# Altium PCB VEND2.PcbDoc
Units mm, origin at the board's own origin, x right, y up, seen from the top; angles counter-clockwise.
Board outline 149.99 x 100.08 mm, 2 copper layers (Top Layer, Bottom Layer); 131 components, 110 nets, 499 pads, 0 vias.
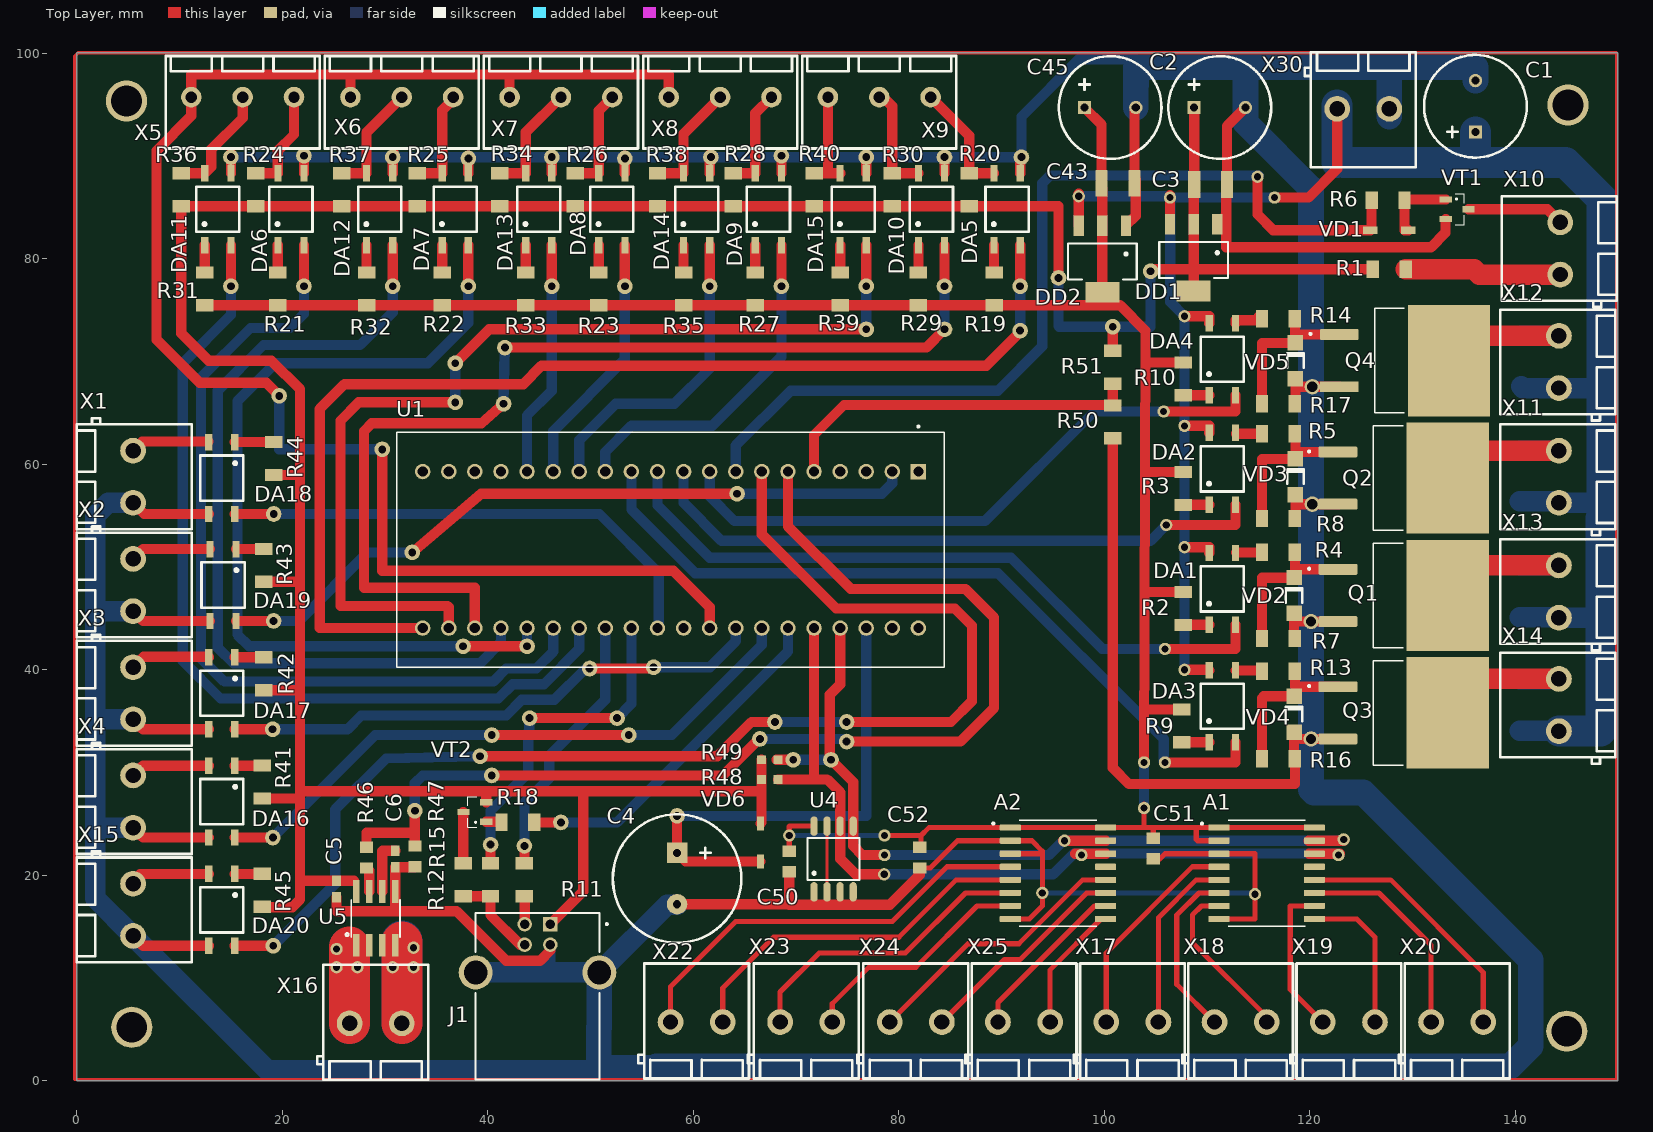
[diagram p0: Top Layer view]
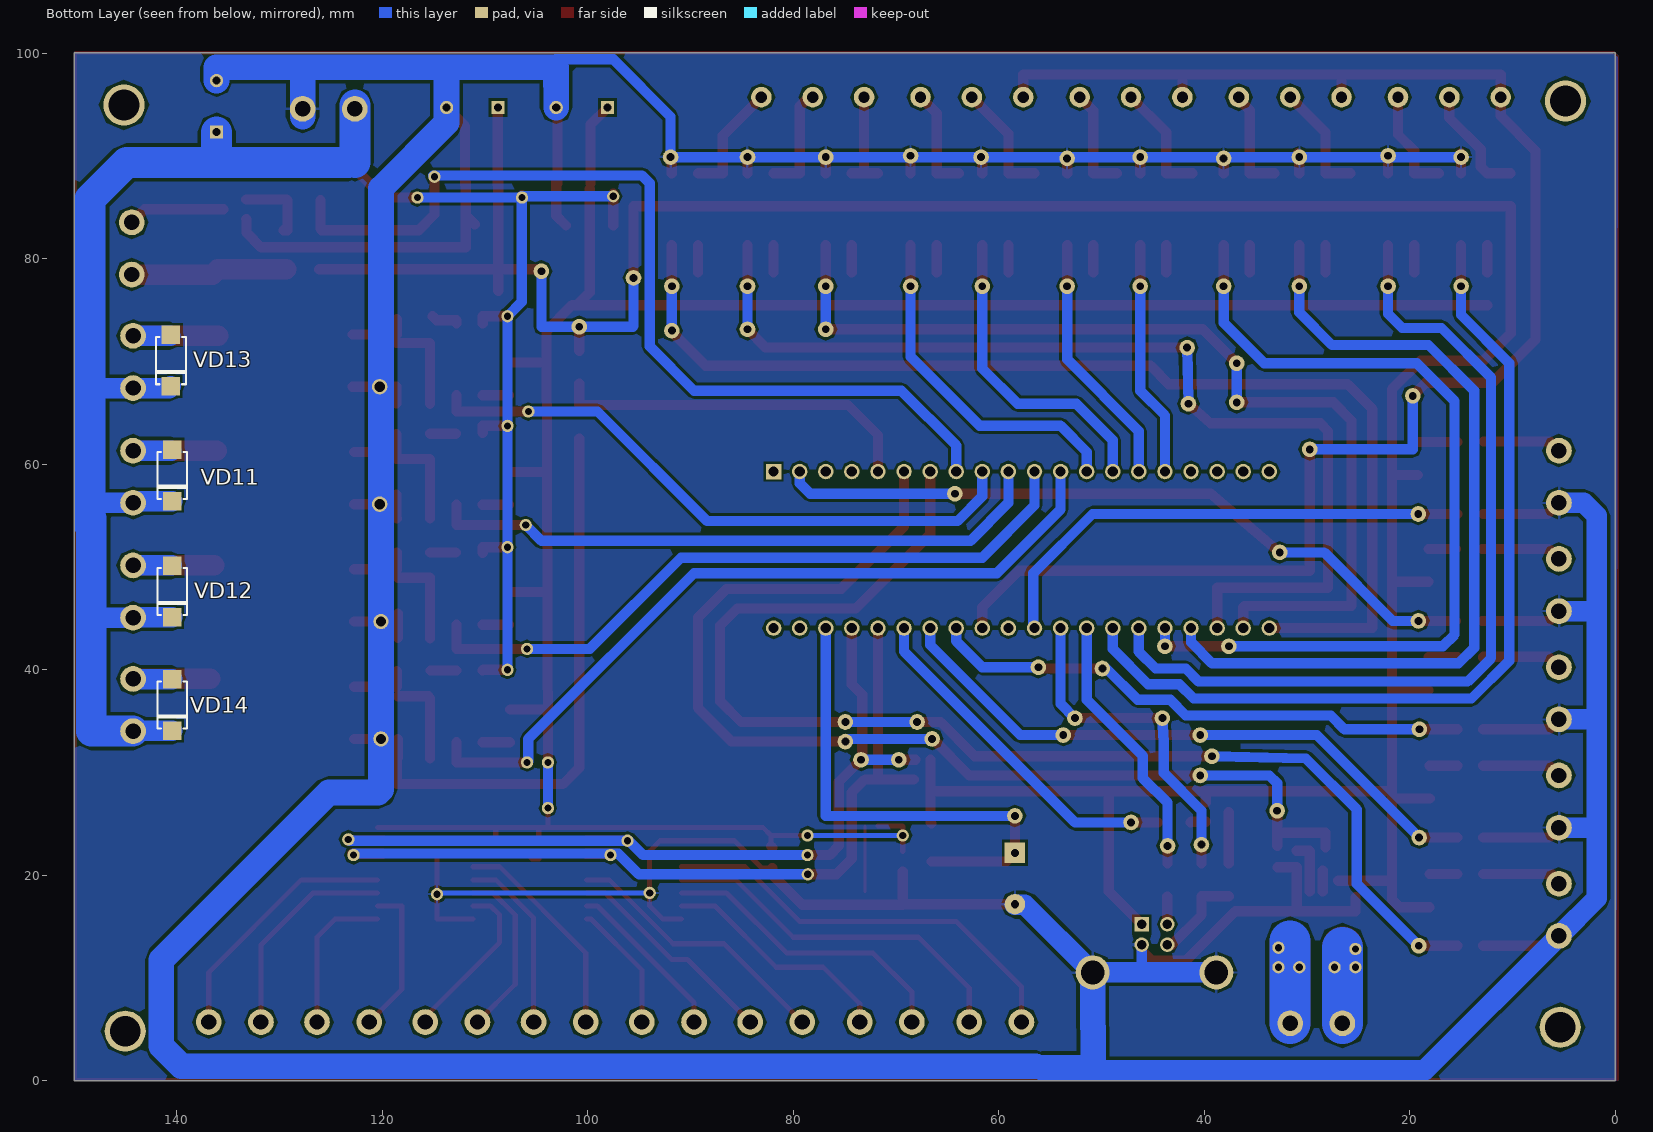
[diagram p1: Bottom Layer view, seen from below]
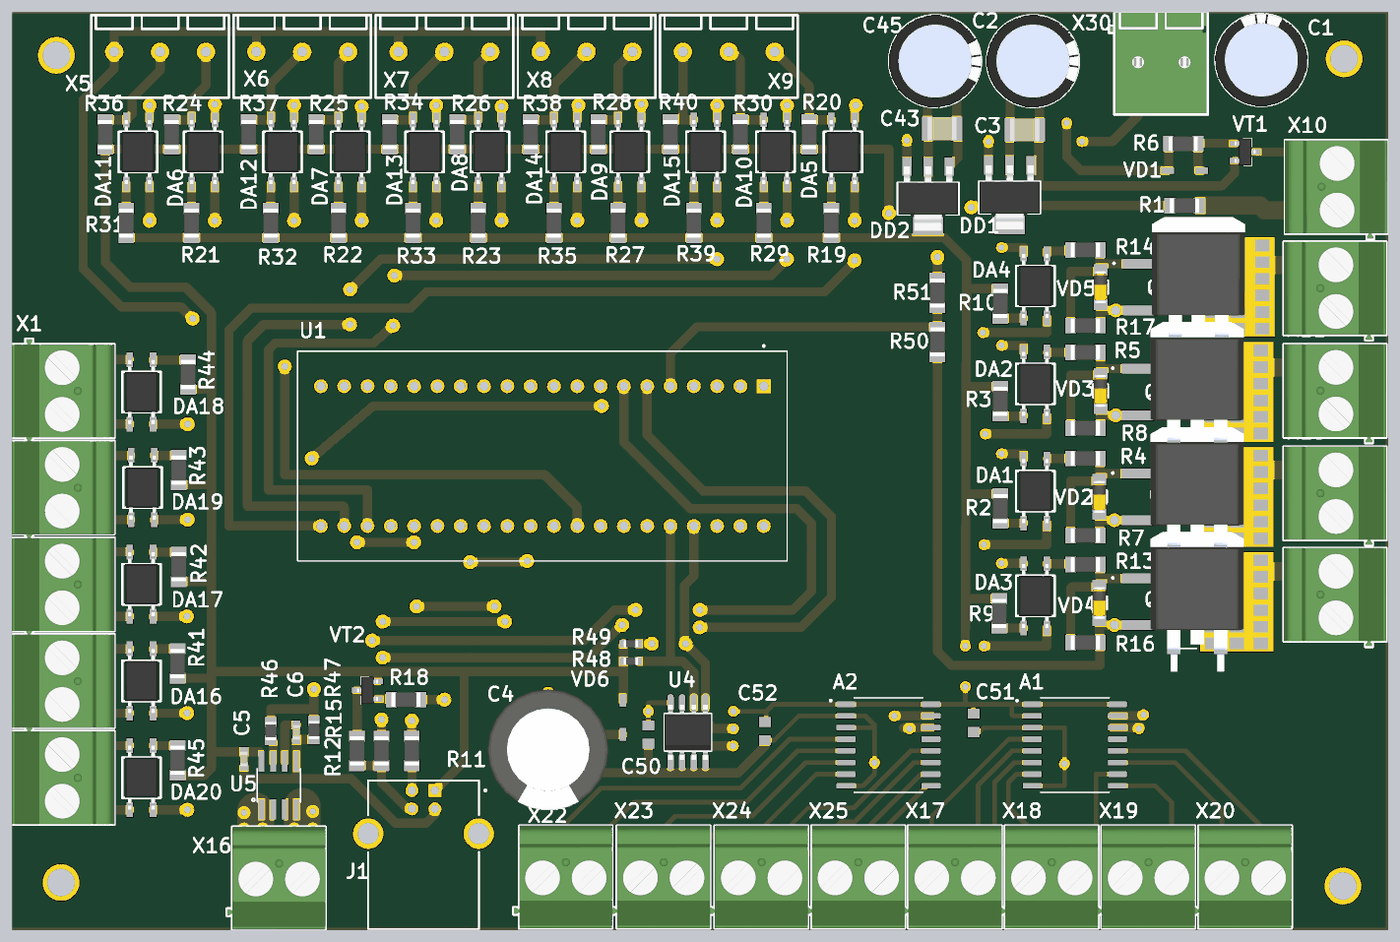
[diagram p2: 3D render of the assembled board from above, using the file's embedded part models]
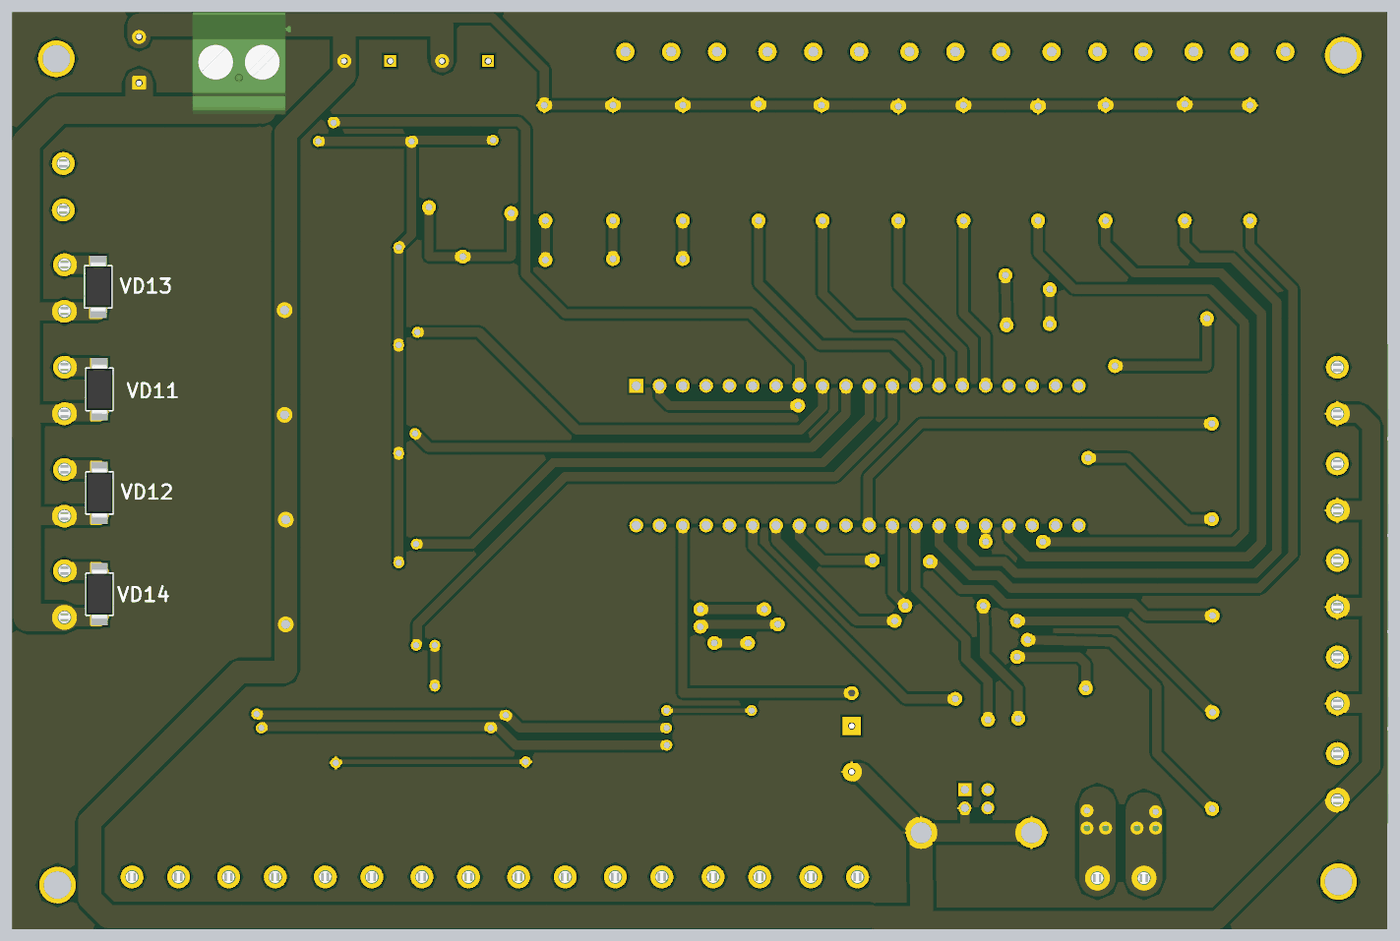
[diagram p3: 3D render of the assembled board from below, using the file's embedded part models]

## Layer stack, top to bottom
Top Solder: solder mask 0.0102, Solder Resist, Dk 3.5
Top Layer: signal copper 0.0356
Dielectric 1: dielectric 0.32, FR-4, Dk 4.8
Bottom Layer: signal copper 0.0356
Bottom Solder: solder mask 0.0102, Solder Resist, Dk 3.5

## Board outline
0,0 149.987,0 149.987,100.076 0,100.076

## Design rules (kind name [scope] priority, off if disabled: settings)
Clearance [All] p1: gap=0.254
PolygonConnect [All] p1: connectstyle=Relief reliefconductorwidth=0.254 reliefentries=4 polygonreliefangle="90 Angle" airgapwidth=0.254
RoomDefinition OUT [InComponentClass('OUT')] p1: confinementstyle=ConfineIn formatcopy=TRUE lockcomponents=FALSE outline 272.796,1.524 546.735,1.524 546.735,34.544 272.796,34.544
RoomDefinition PWR [InComponentClass('PWR')] p2: confinementstyle=ConfineIn formatcopy=TRUE lockcomponents=FALSE outline 179.07,167.513 429.387,167.513 429.387,185.801 179.07,185.801
RoomDefinition STM [InComponentClass('STM')] p3: confinementstyle=ConfineIn formatcopy=TRUE lockcomponents=FALSE outline 302.133,58.928 661.035,58.928 661.035,117.983 302.133,117.983
RoutingVias [All] p1: holewidth=0.711 width=1.27 viastyle="Through Hole" minholewidth=0.711 minwidth=1.27 maxholewidth=0.711 maxwidth=1.27
SolderMaskExpansion [All] p1: expansion=0.102
Width [All] p1: maxlimit=4 minlimit=0.3 preferedwidth=2.5
30 further rules are at their usual default settings.

## Classes and differential pairs
component class OUT: Q1 Q2 Q3 Q4 R7 R8 R9 R10 R11 R12 R13 R14 R15 R16 R17 R18 VD1 VD2 VD3 VD4 VD5 VD11 VD12 VD13 VT2 X11 X12 X13 X14
component class PWR: DA6 DA7 DA8 DA9 DA10
component class STM: C4 DA20 DD1 R41 R42 R43 R44 R49 R50 U1 VD6 X1 X2 X3 X4 X15

## Components (designator, comment, footprint, x,y, rotation, side; value= is the part's Value field where it differs from the comment)
A1 "PCF8574DW" SOIC127P1030X265-16N 115.824,20.193 r0 top
A2 "PCF8574DW" SOIC127P1030X265-16N 95.504,20.193 r0 top
C1 "1000 мкФ" C_10x5 136.144,94.869 r90 top
C2 "1000 мкФ" C_10x5 111.252,94.742 r0 top
C3 "0.1мкФ" C_1210 110.363,87.249 r0 top
C4 "1000 мкФ" C_12.5x5 58.42,19.685 r270 top
C5 "? мкФ" C_0603 25.273,18.669 r270 top
C6 "? мкФ" C_0603 30.988,21.59 r270 top
C43 "0.1мкФ" C_1210 101.346,87.376 r0 top
C45 "1000 мкФ" C_10x5 100.584,94.742 r0 top
C50 "0.1 мкФ" C_0805 69.342,21.336 r270 top
C51 "0.1 мкФ" C_0805 104.775,22.606 r270 top
C52 "0.1 мкФ" C_0805 82.042,21.717 r270 top
DA1 "KPC357NT" Mini-flat-4 111.506,47.879 r90 top
DA2 "KPC357NT" Mini-flat-4 111.506,59.563 r90 top
DA3 "KPC357NT" Mini-flat-4 111.506,36.449 r90 top
DA4 "KPC357NT" Mini-flat-4 111.506,70.231 r90 top
DA5 "KPC357NT" Mini-flat-4 90.551,84.836 r90 top
DA6 "KPC357NT" Mini-flat-4 20.828,84.836 r90 top
DA7 "KPC357NT" Mini-flat-4 36.83,84.836 r90 top
DA8 "KPC357NT" Mini-flat-4 52.07,84.836 r90 top
DA9 "KPC357NT" Mini-flat-4 67.31,84.836 r90 top
DA10 "KPC357NT" Mini-flat-4 83.185,84.841 r90 top
DA11 "KPC357NT" Mini-flat-4 13.716,84.836 r90 top
DA12 "KPC357NT" Mini-flat-4 29.464,84.836 r90 top
DA13 "KPC357NT" Mini-flat-4 44.958,84.836 r90 top
DA14 "KPC357NT" Mini-flat-4 60.325,84.836 r90 top
DA15 "KPC357NT" Mini-flat-4 75.565,84.841 r90 top
DA16 "KPC357NT" Mini-flat-4 14.097,27.178 r270 top
DA17 "KPC357NT" Mini-flat-4 14.097,37.719 r270 top
DA18 "KPC357NT" Mini-flat-4 14.097,58.674 r270 top
DA19 "KPC357NT" Mini-flat-4 14.224,48.26 r270 top
DA20 "KPC357NT" Mini-flat-4 14.097,16.637 r270 top
DD1 "LD1117S" SOT223 108.712,79.883 r270 top
DD2 "LD1117S" SOT223 99.822,79.756 r270 top
J1 "USB-B-S-X-X-TH" SAMTEC_USB-B-S-X-X-TH 44.831,10.541 r0 top
Q1 "IRFZ44N" DPAK254P1524X483-3N 129.159,47.244 r0 top
Q2 "IRFZ44N" DPAK254P1524X483-3N 129.159,58.674 r0 top
Q3 "IRFZ44N" DPAK254P1524X483-3N 129.159,35.814 r0 top
Q4 "IRFZ44N" DPAK254P1524X483-3N 129.286,70.104 r0 top
R1 "?K" R_1206 127.762,78.994 r180 top
R2 "?K" R_1206 107.696,45.974 r270 top
R3 "?K" R_1206 107.696,57.658 r270 top
R4 "?K" R_1206 116.967,51.435 r180 top
R5 "?K" R_1206 116.967,62.992 r180 top
R6 "100" R_1206 127.635,85.725 r0 top
R7 "?K" R_1206 116.967,43.053 r180 top
R8 "?K" R_1206 116.967,54.737 r180 top
R9 "?K" R_1206 107.569,34.544 r270 top
R10 "?K" R_1206 107.696,68.326 r270 top
R11 "100" R_1206 43.561,19.558 r270 top
R12 "100" R_1206 40.259,19.558 r270 top
R13 "?K" R_1206 116.967,39.878 r180 top
R14 "?K" R_1206 116.967,74.168 r180 top
R15 "1.5K" R_1206 37.592,19.558 r90 top
R16 "?K" R_1206 116.967,31.369 r180 top
R17 "?K" R_1206 116.967,65.913 r180 top
R18 "1K" R_1206 42.926,25.146 r180 top
R19 "?K" R_1206 89.281,77.089 r90 top
R20 "?K" R_1206 86.868,86.741 r90 top
R21 "?K" R_1206 19.558,77.089 r90 top
R22 "?K" R_1206 35.56,77.089 r90 top
R23 "?K" R_1206 50.8,77.089 r90 top
R24 "?K" R_1206 17.399,86.741 r90 top
R25 "?K" R_1206 33.147,86.741 r90 top
R26 "?K" R_1206 48.514,86.741 r90 top
R27 "?K" R_1206 66.04,77.089 r90 top
R28 "?K" R_1206 63.881,86.741 r90 top
R29 "?K" R_1206 81.915,77.089 r90 top
R30 "?K" R_1206 79.375,86.741 r90 top
R31 "?K" R_1206 12.446,77.089 r90 top
R32 "?K" R_1206 28.194,77.089 r90 top
R33 "?K" R_1206 43.688,77.089 r90 top
R34 "?K" R_1206 41.148,86.741 r90 top
R35 "?K" R_1206 59.055,77.089 r90 top
R36 "?K" R_1206 10.16,86.741 r90 top
R37 "?K" R_1206 25.781,86.741 r90 top
R38 "?K" R_1206 56.515,86.741 r90 top
R39 "?K" R_1206 74.295,77.089 r90 top
R40 "?K" R_1206 71.755,86.741 r90 top
R41 "?K" R_1206 18.034,29.083 r90 top
R42 "?K" R_1206 18.161,39.624 r90 top
R43 "?K" R_1206 18.161,50.165 r90 top
R44 "?K" R_1206 19.177,60.579 r90 top
R45 "?K" R_1206 18.034,18.542 r90 top
R46 "Value" R_0805 28.194,21.717 r90 top
R47 "?K" R_0805 32.893,21.844 r270 top
R48 "?K" R_0603 67.437,29.337 r0 top
R49 "?K" R_0603 67.437,31.242 r0 top
R50 "?K" R_1206 100.838,64.135 r90 top
R51 "?K" R_1206 100.838,69.469 r270 top
U1 "ZC323000" MODULE_ZC323000 57.785,51.689 r270 top
U4 "AT24C256C-SSHL-B" SOIC8 73.66,21.59 r90 top
U5 "ACS712" SO08 29.083,15.799 r0 top
VD1 "SMA400*" SOD-123 127.762,82.804 r180 top
VD2 "10В" DL-35 118.491,47.244 r90 top
VD3 "10В" DL-35 118.618,58.801 r90 top
VD4 "10В" DL-35 118.491,35.687 r90 top
VD5 "10В" DL-35 118.618,70.104 r90 top
VD6 "1N4148W" SOD-123 66.548,23.194 r270 top
VD11 "SMA400*" "SMA (DO-214AC)" 140.462,58.928 r270 bottom
VD12 "SMA400*" "SMA (DO-214AC)" 140.462,47.625 r270 bottom
VD13 "SMA400*" "SMA (DO-214AC)" 140.589,70.104 r270 bottom
VD14 "SMA400*" "SMA (DO-214AC)" 140.462,36.576 r270 bottom
VT1 "2N7002.215" SOT23 134.366,84.836 r0 top
VT2 "BC857" SOT23 38.735,26.162 r180 top
X1 "DG508V-02" DG508V-02 5.461,58.801 r270 top
X2 "DG508V-02" DG508V-02 5.461,48.26 r270 top
X3 "DG508V-02" DG508V-02 5.461,37.719 r270 top
X4 "DG508V-02" DG508V-02 5.461,27.178 r270 top
X5 "300-031-12" 300-031-12 16.129,95.758 r180 top
X6 "300-031-12" 300-031-12 31.623,95.758 r180 top
X7 "300-031-12" 300-031-12 47.117,95.758 r180 top
X8 "300-031-12" 300-031-12 62.611,95.758 r180 top
X9 "300-031-12" 300-031-12 78.105,95.758 r180 top
X10 "DG508V-02" DG508V-02 144.399,81.026 r90 top
X11 "DG508V-02" DG508V-02 144.272,58.801 r90 top
X12 "DG508V-02" DG508V-02 144.272,69.977 r90 top
X13 "DG508V-02" DG508V-02 144.272,47.625 r90 top
X14 "DG508V-02" DG508V-02 144.272,36.576 r90 top
X15 "DG508V-02" DG508V-02 5.461,16.637 r270 top
X16 "DG508V-02" DG508V-02 29.083,5.588 r0 top
X17 "DG508V-02" DG508V-02 102.743,5.715 r0 top
X18 "DG508V-02" DG508V-02 113.284,5.715 r0 top
X19 "DG508V-02" DG508V-02 123.825,5.715 r0 top
X20 "DG508V-02" DG508V-02 134.366,5.715 r0 top
X22 "DG508V-02" DG508V-02 60.325,5.715 r0 top
X23 "DG508V-02" DG508V-02 70.993,5.715 r0 top
X24 "DG508V-02" DG508V-02 81.661,5.715 r0 top
X25 "DG508V-02" DG508V-02 92.202,5.715 r0 top
X30 "DG508V-02" DG508V-02 125.222,94.615 r0 top

## Footprints (in the part's own frame and the unit in brackets; to place one, negate y for a bottom-side part, rotate by r counter-clockwise, add the part's x,y. Pads: shape width x height; smd on the part's side, far side on the other; paste and mask are expansions set on the pad)
300-031-12 [mm] "шаг 5 мм"
  round 2 hole 1.1: 1(-5,0) 2(0,0) 3(5,0)
  silkscreen extent -7.5,-4 7.5,5
C_10x5 [mm] "в отверстие"
  rect 1.3x1.3 hole 0.8: 1(-2.5,0)
  round 1.3 hole 0.8: 2(2.5,0)
  silkscreen extent -5,-5 5,5, body extent -5.04,-5.06 5.08,5.06, height 13.2
C_12.5x5 [mm] "в отверстие"
  rect 2x2 hole 0.8: 1(-2.5,0)
  round 2 hole 0.8: 2(2.5,0)
  silkscreen extent -6.25,-6.25 6.25,6.25, body extent -6.6,-6.6 6.6,6.6, height 25.4
C_0603 [mm] "SMD"
  rect 1x0.85 smd: 1(-0.8,0) 2(0.8,0)
  body extent -0.8,-0.4 0.8,0.4, height 0.79
C_0805 [mm] "SMD"
  rect 1.1x1.3 smd: 1(-1,0) 2(1,0)
  body extent -1,-0.62 1,0.63, height 0.6
C_1210 [mm] "SMD"
  rect 1.2x2.6 smd: 1(-1.6,0) 2(1.6,0)
  body extent -1.6,-1.25 1.6,1.25, height 0.77
DG508V-02 [mm] "шаг 5,08 мм"
  round 2.5 hole 1.5: 1(-2.54,0) 2(2.54,0)
  silkscreen extent -5.7,-5.5 5.1,5.7, body extent -5.63,-5.5 5.1,5.7, height 18.3
DL-35 [mm] "SMD"
  rect 1.5x1.5 smd: 1(-1.75,0) 2(1.75,0)
  silkscreen extent -0.7,-0.8 0.7,0.8, body extent -1.75,-0.75 1.75,0.75, height 1.49
DPAK254P1524X483-3N [mm]
  rrect25% 3.78x1.06 smd: 1(-6.4,2.54) 3(-6.4,-2.54)
  rect 8x10.84 smd paste-6: 2(4.29,0)
  silkscreen extent -9.3,-5.08 -0.05,5.08, body extent -5.08,-7.62 5.08,7.62, height 4.83
Mini-flat-4 [mm] "SMD"
  rect 1.6x0.7 smd: 1(-3.5,1.27) 2(-3.5,-1.27) 3(3.5,-1.27) 4(3.5,1.27)
  silkscreen extent -2.2,-2.1 2.2,2.1, body extent -3.5,-1.8 3.5,1.8, height 2
MODULE_ZC323000 [mm]
  rect 1.508x1.508 hole 1: 1(-7.62,24.13)
  round 1.508 hole 1: 2(-7.62,21.59) 3(-7.62,19.05) 4(-7.62,16.51) 5(-7.62,13.97) 6(-7.62,11.43) 7(-7.62,8.89) 8(-7.62,6.35) 9(-7.62,3.81) 10(-7.62,1.27) 11(-7.62,-1.27) 12(-7.62,-3.81) 13(-7.62,-6.35) 14(-7.62,-8.89) 15(-7.62,-11.43) 16(-7.62,-13.97) 17(-7.62,-16.51) 18(-7.62,-19.05) 19(-7.62,-21.59) 20(-7.62,-24.13) 21(7.62,-24.13) 22(7.62,-21.59) 23(7.62,-19.05) 24(7.62,-16.51) 25(7.62,-13.97) 26(7.62,-11.43) 27(7.62,-8.89) 28(7.62,-6.35) 29(7.62,-3.81) 30(7.62,-1.27) 31(7.62,1.27) 32(7.62,3.81) 33(7.62,6.35) 34(7.62,8.89) 35(7.62,11.43) 36(7.62,13.97) 37(7.62,16.51) 38(7.62,19.05) 39(7.62,21.59) 40(7.62,24.13)
  silkscreen extent -12.1,-26.67 11.43,26.67
R_0603 [mm] "SMD"
  rect 0.85x0.85 smd: 1(-0.8,0) 2(0.8,0)
  body extent -0.8,-0.4 0.8,0.4, height 0.38
R_0805 [mm] "SMD"
  rect 1.1x1.25 smd: 1(-1,0) 2(1,0)
  body extent -1,-0.6 1,0.6, height 0.5
R_1206 [mm] "SMD"
  rect 1.2x1.7 smd: 1(-1.6,0) 2(1.6,0)
  body extent -1.6,-0.8 1.6,0.8, height 0.6
SAMTEC_USB-B-S-X-X-TH [mm]
  rect 1.408x1.408 hole 0.9: 1(1.25,4.7)
  round 1.408 hole 0.9: 2(-1.25,4.7) 3(-1.25,2.7) 4(1.25,2.7)
  round 3.316 hole 2.3: S1(-6.02,0) S2(6.02,0)
  silkscreen extent -6.05,-10.4 6.85,5.8
"SMA (DO-214AC)" [mm] "SMD"
  rect 1.8x1.8 smd: A(-2.5,0) K(2.5,0)
  silkscreen extent -2.3,-1.45 2.3,1.45, body extent -2.8,-1.45 2.8,1.45, height 2.4
SO08 [mil]
  rect 24x87 smd: 1(-75,-103) 2(-25,-103) 3(25,-103) 4(75,-103) 5(75,103) 6(25,103) 7(-25,103) 8(-75,103)
  silkscreen extent -115,-71 93,71
SOD-123 [mm] "SMD"
  rect 1.4x0.7 smd: A(-1.85,0) K(1.85,0)
  body extent -1.95,-0.9 1.95,0.9, height 1.18
SOIC8 [mm]
  oval 1.9x0.7 smd: 1(-3.2,1.905) 2(-3.2,0.635) 3(-3.2,-0.635) 4(-3.2,-1.905) 5(3.2,-1.905) 6(3.2,-0.635) 7(3.2,0.635) 8(3.2,1.905)
  silkscreen extent -2.03,-2.54 2.03,2.54, body extent -3,-2.54 3,2.54, height 1.7
SOIC127P1030X265-16N [mm]
  rrect25% 2.06x0.6 smd: 1(-4.64,4.445) 2(-4.64,3.175) 3(-4.64,1.905) 4(-4.64,0.635) 5(-4.64,-0.635) 6(-4.64,-1.905) 7(-4.64,-3.175) 8(-4.64,-4.445) 9(4.64,-4.445) 10(4.64,-3.175) 11(4.64,-1.905) 12(4.64,-0.635) 13(4.64,0.635) 14(4.64,1.905) 15(4.64,3.175) 16(4.64,4.445)
  silkscreen extent -6.4,-5.15 3.75,5.15
SOT23 [mm] "SMD"
  rect 1.2x0.6 smd: 1(-1.1,0.95) 2(-1.1,-0.95) 3(1.1,0)
  silkscreen extent -0.2,-1.5 0.7,1.5, body extent -1.15,-1.5 1.15,1.5, height 1.1
SOT223 [mm] "SMD"
  rect 2x1 smd: 1(-3.5,2.3) 2(-3.5,0) 3(-3.5,-2.3)
  rect 2x3.3 smd: 4(3,0)
  silkscreen extent -1.75,-3.35 1.75,3.35, body extent -3.5,-3.25 3.5,3.25, height 1.64

## Part data
A1 A2: "Remote 8-Bit I/O Expander for I2C-Bus 16-SOIC -40 to 85"
C1 C2 C45: library part "Конденсатор 25х12.5", "К50-35"
C3 C43: library part "Конденсатор 1210", "SMD"
C4: library part "Конденсатор 16х7.5", "К50-35"
C5 C6: library part "Конденсатор 0603", "SMD"
C50 C51 C52: library part "Конденсатор 0805", "SMD"
DA1 DA2 DA3 DA4 DA5 DA6 DA7 DA8 DA9 DA10 DA11 DA12 DA13 DA14 DA15 DA16 DA17 DA18 DA19 DA20: "оптрон, SMD"
DD1 DD2: "Стабилизатор SOT223"
J1: "USB-B (USB TYPE-B) USB 2.0 Receptacle Connector 4 Position Through Hole, Right Angle"
Q1 Q2 Q3 Q4: library part IRFZ44NSTRRPBF, "N-Channel 55V 49A (Tc) 3.8W (Ta), 94W (Tc) Surface Mount D2PAK"
R1 R2 R3 R4 R5 R6 R7 R8 R9 R10 R11 R12 R13 R14 R15 R16 R17 R18 R19 R20 R21 R22 R23 R24 R25 R26 R27 R28 R29 R30 R31 R32 R33 R34 R35 R36 R37 R38 R39 R40 R41 R42 R43 R44 R45 R46 R47 R48 R49 R50 R51: library part "Резистор 1206", "0,25 Вт"
U1: "STM32F103C8T6 ARM STM32 Minimum System Development Board Module For Arduino"
U4: "EEPROM Memory IC 256Kb _32K x 8_ IA?C 1MHz 550ns 8-SOIC"
U5: "Current Sensor 5A 1 Channel Hall Effect, Open Loop Bidirectional 8-SOIC (0.154, 3.90mm Width)"
VD1 VD6 VD11 VD12 VD13 VD14: "диод, SMD"
VD2 VD3 VD4 VD5: library part BZV55C***, "стабилитрон, SMD"
VT1: "MOSFET, SOT23"
VT2: "PNP, SMD"
X1 X2 X3 X4 X10 X11 X12 X13 X14 X15 X16 X17 X18 X19 X20 X22 X23 X24 X25 X30: "клеммник винтовой 2к.,5.08мм"
X5 X6 X7 X8 X9: "клеммник винтовой 3к.,5мм"

## Free pads (board coordinates)
  round 4 hole 3: 0(5.334,5.207) 1(145.034,4.826) 2(145.161,94.996) 3(4.826,95.377)
  round 1.2 hole 0.7: 6(97.522,86.106) 7(106.412,85.979) 8(107.823,40.005) 9(107.823,51.943) 10(107.823,63.754) 11(107.823,74.422) 12(103.886,30.988) 18(114.935,88.011) 19(116.586,85.979) 20(105.791,65.151) 21(106.045,54.102) 22(105.918,42.037) 23(105.918,30.988) 24(78.585,20.094) 25(78.613,21.971) 92(25.273,12.827) 93(32.766,12.954) 94(25.273,11.049) 95(27.305,11.049) 96(30.734,11.049) 97(32.766,11.049) 98(69.342,23.876) 99(78.613,23.876) 102(93.98,18.288) 103(114.681,18.161) 106(123.317,23.495) 107(96.139,23.368) 108(97.79,21.971) 109(122.809,21.971) 110(103.886,26.543)
  round 1.5 hole 1: 14(120.142,33.274) 14(120.142,44.704) 14(120.269,56.134) 14(120.269,67.564)
  round 1.524 hole 0.762: 26(14.986,89.916) 27(22.098,90.043) 28(30.734,89.916) 29(38.1,89.789) 30(46.228,89.916) 31(53.34,89.789) 32(61.722,89.916) 33(68.58,90.043) 34(76.835,89.916) 35(84.455,89.916) 36(91.948,89.916) 37(91.821,77.343) 38(84.455,77.343) 39(76.835,77.343) 40(68.58,77.343) 41(61.595,77.343) 42(53.34,77.343) 43(46.228,77.343) 44(38.1,77.343) 45(30.734,77.343) 46(22.098,77.343) 47(14.986,77.343) 49(104.521,78.803) 50(100.838,73.406) 51(19.106,13.137) 52(19.072,23.678) 53(19.05,34.219) 54(19.142,44.76) 55(19.149,55.174) 57(73.406,31.242) 58(69.723,31.242) 59(47.117,25.146) 60(40.259,22.987) 61(43.561,22.86) 62(58.42,25.781) 63(44.069,35.306) 64(52.578,35.306) 65(95.555,78.156) 66(53.721,33.655) 67(40.386,33.655) 68(49.911,40.132) 69(56.134,40.259) 70(32.893,26.289) 71(40.386,29.718) 72(66.484,33.274) 73(74.93,33.02) 74(39.243,31.589) 75(67.945,34.925) 77(74.93,34.925) 79(43.815,42.291) 80(37.592,42.291) 81(91.821,73.025) 82(84.455,73.152) 83(76.835,73.152) 84(36.83,69.85) 85(36.83,66.04) 86(41.656,71.374) 87(41.529,65.913) 88(32.639,51.435) 89(64.262,57.15) 90(19.685,66.675) 91(29.718,61.468)

## Nets (pads, with @x,y where several pads share a name; then routed paths per layer and width w, separated by ;. In a path a pad name is that pad's centre, name@x,y a point inside that pad or via, vN(x,y) a via of type N, cw(c..) or ccw(c..) an arc to the next point about the centre after c; other vN are vias at no path point)
3V: A1.1 A1.2 A1.16 A2.1 A2.16 C43.1 C45.1 C50.1 C51.1 C52.1 DD2.2 DD2.4 pad.12 pad.98 pad.99 pad.110 R2.1 R3.1 R9.1 R10.1 R19.1 R21.1 R22.1 R23.1 R27.1 R29.1 R31.1 R32.1 R33.1 R35.1 R39.1 U4.8 | length 237.6
  Top Layer w0.5: C50.1 pad.98 69.342,24.765 69.367,24.79 U4.8 ; pad.99 82.169,23.876 ; C52.1@82.169,22.844 82.169,23.876 ; pad.110@103.886,26.924 pad.110 103.886,24.638 ; C51.1 104.775,24.638 ; A1.2 109.093,23.368 108.966,23.495 108.966,24.638 ; A1.16 A1.1 108.966,24.638 ; 82.169,23.876 82.931,24.638 A2.1 A2.16 103.886,24.638 ; 103.886,24.638 104.775,24.638 ; 104.775,24.638 108.966,24.638
  Top Layer w1: R31.1 R21.1 R32.1 R22.1 R33.1 R23.1 R35.1 R27.1 R39.1 R29.1 R19.1 101.549,75.489 104.013,73.025 pad.12 ; C52.1 C52.1@82.169,22.844 ; C45.1 99.746,93.08 C43.1 ; C43.1@99.822,86.792 DD2.2 DD2.4 101.013,75.565 ; 104.013,36.144 R9.1 ; 104.013,59.258 R3.1 ; 104.013,69.926 R10.1 ; 104.14,47.574 R2.1
  Bottom Layer w0.5: pad.98 pad.99
  Bottom Layer w1: pad.110 pad.12
5V: C2.1 C3.1 C5.1 DD1.2 DD1.4 J1.1 pad.49 pad.50 pad.65 R1.2 R20.1 R24.1 R25.1 R26.1 R28.1 R30.1 R34.1 R36.1 R37.1 R38.1 R40.1 R41.1 R42.1 R43.1 R44.1 R45.1 R48.1 R49.1 R51.1 U5.8 VD6.A VT2.2 | length 317.7
  Top Layer w1: R41.1 21.666,27.483 ; R45.1@18.085,16.891 20.955,16.891 21.717,17.653 21.717,28.194 39.835,28.194 ; R42.1 21.666,38.024 ; R43.1 21.412,48.565 ; R44.1 21.666,58.979 21.717,58.928 ; 21.717,28.321 21.717,58.928 ; 21.806,19.469 C5.1 U5.8@26.962,19.469 ; VT2.2 39.835,28.194 ; J1.1 49.276,18.436 49.276,28.194 ; 49.149,28.067 49.276,28.194 ; VD6.A 66.637,25.133 66.637,28.283 ; R49.1 R48.1 66.637,28.283 ; pad.65 95.555,85.141 R20.1 R30.1 R40.1 R28.1 R38.1 R26.1 R34.1 R25.1 R37.1 R24.1 R36.1 10.16,72.771 12.827,70.104 18.923,70.104 21.717,67.31 21.717,58.928 ; R51.1 pad.50 ; pad.49 104.521,78.994 108.712,78.994 ; DD1.4 108.712,78.994 ; C3.1@108.712,87.706 DD1.2 108.712,78.994 ; C3.1 C2.1@108.763,94.731 ; 108.839,78.994 R1.2 ; 39.835,28.194 49.276,28.194 ; 49.276,28.194 66.548,28.194 66.637,28.283
  Bottom Layer w1: pad.65 95.555,73.482 95.631,73.406 pad.50 ; pad.50@101.473,73.406 104.521,73.406 pad.49
GND: A1.3 A1.8 A2.2 A2.3 A2.8 C1.2 C2.2 C3.2 C4.2 C5.2 C6.2 C43.2 C45.2 C50.2 C51.2 C52.2 DA5.3 DA6.3 DA7.3 DA8.3 DA9.3 DA10.3 DA11.3 DA12.3 DA13.3 DA14.3 DA15.3 DA16.3 DA17.3 DA18.3 DA19.3 DA20.3 DD1.1 DD2.1 J1.4 J1.S1 J1.S2 pad.14 pad.26 pad.27 pad.28 pad.29 pad.30 pad.31 pad.32 pad.33 pad.34 pad.35 pad.36 pad.102 pad.103 Q1.3 Q2.3 Q3.3 Q4.3 R7.1 R8.1 R16.1 R17.1 R47.2 R50.1 U4.1 U4.2 U4.3 U4.4 U4.7 U5.5 VD2.1 VD3.1 VD4.1 VD5.1 VT1.2 X1.2 X2.2 X3.2 X4.2 X15.2 X30.2 | length 798.5
  Top Layer w0.3: U4.2 U4.7
  Top Layer w0.5: C52.2 83.074,20.717 85.725,23.368 A2.2 92.964,23.368 93.98,22.352 93.98,22.098 ; A2.8 92.71,15.748 93.98,17.018 pad.102 93.98,22.098 ; A2.3 93.98,22.098 ; C51.2 105.426,21.606 105.918,22.098 A1.3 114.681,22.098 pad.103 114.681,15.748 A1.8
  Top Layer w1: X15.2 6.421,13.137 DA20.3 ; X4.2 6.421,23.678 DA16.3 ; X3.2 6.421,34.219 DA17.3 ; X2.2 6.421,44.76 DA19.3 ; X1.2 6.548,55.174 DA18.3 ; DA11.3 pad.26 pad.26@14.986,90.297 ; DA6.3 pad.27 ; C5.2 25.273,16.51 30.988,16.51 ; DA12.3 pad.28 30.734,90.17 pad.28@30.861,90.297 ; R47.2@32.839,20.79 C6.2 U5.5 30.988,16.51 ; DA7.3 pad.29 pad.29@38.1,90.043 ; J1.4@46.081,12.68 45.085,11.684 41.783,11.684 36.957,16.51 30.988,16.51 ; DA13.3 pad.30 pad.30@46.228,90.17 ; DA8.3 pad.31 pad.31@53.34,90.043 ; C4.2 69.342,17.185 C50.2 ; DA14.3 pad.32@61.595,90.17 ; DA9.3 pad.33 ; 69.342,17.145 79.121,17.145 82.042,20.066 C52.2 ; DA15.3 pad.34 pad.34@76.835,90.17 ; DA10.3 pad.35 pad.35@84.455,90.17 ; DA5.3 pad.36@91.821,90.043 ; R50.1 100.838,30.455 102.413,28.88 118.567,28.88 R16.1 ; DD2.1 103.073,84.207 C43.2@103.073,87.757 ; C43.2 C45.2@102.946,94.604 ; DD1.1 111.887,84.258 ; C3.2@111.887,87.452 111.887,84.258 ; C3.2 111.963,92.953 C2.2 ; R16.1@118.491,31.445 VD4.1@118.491,33.274 ; R7.1@118.491,43.129 VD2.1 ; R8.1 118.618,54.788 118.618,56.134 ; 118.618,44.704 120.142,44.704 Q1.3 ; VD3.1 118.618,56.134 ; R17.1@118.618,65.964 118.618,67.564 120.269,67.564 Q4.3 ; VD4.1@119.154,33.274 120.142,33.274 Q3.3 ; Q2.3 120.269,56.134 118.618,56.134 ; VT1.2 133.223,83.843 133.223,82.55 131.826,81.153 111.887,81.153 111.887,84.258
  Bottom Layer w0.5: pad.102 pad.103@114.554,18.288
  Bottom Layer w1: pad.26 pad.28 pad.30 pad.32 pad.34 pad.35 pad.36 91.948,93.853 97.536,99.441 103.111,99.441 ; 46.081,10.688 J1.4
  Bottom Layer w2: 1.905,45.72 X2.2 ; 2.032,24.638 X4.2 ; X3.2 1.778,35.179 ; X1.2 3.048,56.261 1.778,54.991 1.778,35.179 ; J1.S1 J1.S2 57.455,17.145 C4.2@58.42,17.145 ; 51.308,1.016 18.542,1.016 X15.2 1.778,17.78 1.778,35.179
  Bottom Layer w2.5: J1.S2 50.851,5.156 50.8,5.207 50.8,1.27 55.753,1.27 ; 56.388,1.397 139.552,1.397 141.53,3.375 141.53,11.759 125.222,28.067 120.396,28.067 120.142,28.321 120.142,33.274 120.142,44.704 120.142,86.868 113.752,93.258 C2.2 113.752,97.242 ; C45.2 103.106,98.679 127.762,98.679 ; X30.2@127.762,93.853 X30.2 127.762,98.679 ; C1.2 136.144,98.679 127.762,98.679
NetA1_4: A1.4 X17.1 | length 21.2
  Top Layer w0.5: X17.1 100.203,12.446 108.585,20.828 A1.4
NetA1_5: A1.5 X17.2 | length 17.6
  Top Layer w0.5: X17.2 105.283,15.875 108.966,19.558 A1.5
NetA1_6: A1.6 X18.1 | length 17
  Top Layer w0.5: X18.1 107.061,9.398 107.061,16.129 109.22,18.288 A1.6
NetA1_7: A1.7 X18.2 | length 15.9
  Top Layer w0.5: A1.7 109.474,17.018 108.585,16.129 108.585,13.462 X18.2@115.824,6.223
NetA1_9: A1.9 X19.2 | length 14.9
  Top Layer w0.5: A1.9 124.587,15.748 126.365,13.97 X19.2
NetA1_10: A1.10 X19.1 | length 15
  Top Layer w0.5: A1.10 118.11,17.018 118.11,8.89 X19.1
NetA1_11: A1.11 X20.1 | length 21
  Top Layer w0.5: A1.11 126.746,18.288 131.826,13.208 X20.1
NetA1_12: A1.12 X20.2 | length 25
  Top Layer w0.5: A1.12 127.889,19.558 136.906,10.541 X20.2
NetA1_14: A1.14 A2.14 pad.24 pad.108 pad.109 R48.2 U1.36 U4.6 | length 83.8
  Top Layer w1: R48.2 73.025,29.337 74.295,28.067 U4.6 74.295,21.618 75.819,20.094 pad.24 ; 71.755,29.464 U1.36 U1.36@71.882,43.942 ; 97.155,22.098 A2.14 ; A1.14@119.956,22.098 pad.109@122.936,22.098
  Bottom Layer w1: pad.24 95.024,20.094 97.044,22.114 pad.109@122.809,22.114
NetA1_15: A1.15 A2.15 pad.25 pad.57 pad.58 pad.106 pad.107 R49.2 U1.37 U4.5 | length 84.2
  Top Layer w1: R49.2@68.11,31.242 pad.58 ; U1.37 74.295,38.608 73.279,37.592 73.279,31.496 pad.57 75.565,29.083 U4.5 75.565,22.86 76.454,21.971 pad.25 ; pad.107@96.012,23.368 A2.15 ; A1.15@119.888,23.368 pad.106@123.317,23.368
  Bottom Layer w1: pad.58 pad.57 ; pad.25 94.615,21.971 96.012,23.368 123.19,23.368 pad.106
NetA2_4: A2.4 X22.1 | length 41.3
  Top Layer w0.5: X22.1 57.785,9.144 64.135,15.494 79.375,15.494 84.709,20.828 A2.4
NetA2_5: A2.5 X22.2 | length 35.7
  Top Layer w0.5: X22.2 62.865,9.017 67.818,13.97 80.01,13.97 85.598,19.558 A2.5
NetA2_6: A2.6 X23.1 | length 29.3
  Top Layer w0.5: X23.1 68.453,8.636 72.263,12.446 80.645,12.446 86.487,18.288 A2.6
NetA2_7: A2.7 X23.2 | length 23.1
  Top Layer w0.5: X23.2 73.533,7.493 77.089,11.049 81.661,11.049 87.63,17.018 A2.7
NetA2_9: A2.9 X25.2 | length 12.5
  Top Layer w0.5: X25.2 94.742,10.795 99.695,15.748 A2.9
NetA2_10: A2.10 X25.1 | length 16.3
  Top Layer w0.5: X25.1 89.662,7.62 99.06,17.018 A2.10
NetA2_11: A2.11 X24.2 | length 21.2
  Top Layer w0.5: X24.2 90.297,11.811 91.821,11.811 98.298,18.288 A2.11
NetA2_12: A2.12 X24.1 | length 26.8
  Top Layer w0.5: X24.1 86.741,13.335 91.694,13.335 97.917,19.558 A2.12
NetC4_1: C4.1 pad.62 U1.38 VD6.K | length 48.8
  Top Layer w1: pad.62 C4.1 59.261,21.344 VD6.K
  Bottom Layer w1: pad.62 76.835,25.781 U1.38
NetC6_1: C6.1 U5.6 | length 5.2
  Top Layer w1: U5.6 29.718,22.352 29.756,22.39 C6.1
NetDA1_1: DA1.1 R2.2 | length 2.5
  Top Layer w1: R2.2@107.701,44.379 DA1.1
NetDA1_2: DA1.2 pad.22 U1.11 | length 67.7
  Top Layer w1: pad.22 112.776,42.037 DA1.2
  Bottom Layer w1: U1.11 56.515,56.007 61.595,50.927 90.932,50.927 99.822,42.037 pad.22
NetDA1_3: DA1.3 R4.2 | length 2.5
  Top Layer w1: DA1.3@112.832,51.435 R4.2
NetDA2_1: DA2.1 R3.2 | length 2.5
  Top Layer w1: R3.2@107.701,56.063 DA2.1
NetDA2_2: DA2.2 pad.21 U1.10 | length 60.9
  Top Layer w1: pad.21 112.776,54.102 DA2.2
  Bottom Layer w1: U1.10 59.055,56.261 62.738,52.578 104.521,52.578 pad.21
NetDA2_3: DA2.3 R5.2 | length 2.5
  Top Layer w1: DA2.3@112.847,62.992 R5.2
NetDA3_1: DA3.1 R9.2 | length 2.7
  Top Layer w1: R9.2 DA3.1@110.231,32.944
NetDA3_2: DA3.2 pad.23 U1.12 | length 75.9
  Top Layer w1: pad.23 112.776,30.988 DA3.2
  Bottom Layer w1: U1.12 53.975,55.626 60.198,49.403 89.662,49.403 105.791,33.274 105.791,31.115 pad.23
NetDA3_3: DA3.3 R13.2 | length 2.5
  Top Layer w1: DA3.3 R13.2@115.296,39.949
NetDA4_1: DA4.1 R10.2 | length 2.5
  Top Layer w1: R10.2@107.701,66.731 DA4.1
NetDA4_2: DA4.2 pad.20 U1.9 | length 60.6
  Top Layer w1: pad.20 112.776,65.151 DA4.2
  Bottom Layer w1: U1.9 61.595,56.896 64.008,54.483 88.392,54.483 99.06,65.151 pad.20
NetDA4_3: DA4.3 R14.2 | length 2.8
  Top Layer w1: DA4.3 112.776,74.041 114.732,74.041 R14.2@115.113,74.422
NetDA5_1: DA5.1 R19.2 | length 2.6
  Top Layer w1: R19.2 DA5.1
NetDA5_2: DA5.2 pad.37 pad.81 U1.21 | length 110.9
  Top Layer w1: U1.21 23.622,44.069 23.622,65.405 26.035,67.818 43.434,67.818 45.212,69.596 88.519,69.596 91.821,72.898 pad.81 ; pad.37@91.821,77.597 DA5.2
  Bottom Layer w1: pad.81 pad.37
NetDA5_4: DA5.4 R20.2 X9.1 | length 11.4
  Top Layer w1: X9.1 86.868,91.995 R20.2 DA5.4@89.276,88.341
NetDA6_1: DA6.1 R21.2 | length 2.6
  Top Layer w1: R21.2 DA6.1
NetDA6_2: DA6.2 pad.46 U1.26 | length 84.9
  Top Layer w1: pad.46@22.098,77.724 DA6.2
  Bottom Layer w1: pad.46 22.098,74.676 20.701,73.279 16.891,73.279 12.065,68.453 12.065,41.148 14.351,38.862 40.513,38.862 41.783,40.132 44.704,40.132 46.355,41.783 U1.26
NetDA6_4: DA6.4 R24.2 X5.1 | length 10.5
  Top Layer w1: R24.2@17.15,88.336 DA6.4 19.558,90.551 21.129,92.122 X5.1
NetDA7_1: DA7.1 R22.2 | length 2.6
  Top Layer w1: R22.2 DA7.1
NetDA7_2: DA7.2 pad.44 pad.79 pad.80 U1.25 | length 86
  Top Layer w1: pad.80 pad.79 ; pad.44@38.1,77.724 DA7.2
  Bottom Layer w1: pad.80 16.764,42.291 15.621,43.434 15.621,66.167 19.304,69.85 34.163,69.85 38.1,73.787 pad.44 ; pad.79 U1.25
NetDA7_4: DA7.4 R25.2 X6.1 | length 10.3
  Top Layer w1: R25.2 DA7.4@35.555,88.341 ; DA7.4 35.56,94.488 36.623,95.551 X6.1
NetDA8_1: DA8.1 R23.2 | length 2.6
  Top Layer w1: R23.2 DA8.1
NetDA8_2: DA8.2 pad.42 U1.15 | length 24.5
  Top Layer w1: pad.42@53.34,77.724 DA8.2
  Bottom Layer w1: U1.15 46.355,63.246 53.34,70.231 pad.42
NetDA8_4: DA8.4 R26.2 X7.1 | length 10.2
  Top Layer w1: R26.2 DA8.4@50.795,88.341 ; DA8.4 50.8,94.441 X7.1
NetDA9_1: DA9.1 R27.2 | length 2.6
  Top Layer w1: R27.2 DA9.1
NetDA9_2: DA9.2 pad.40 U1.13 | length 33.5
  Top Layer w1: pad.40@68.58,77.597 DA9.2
  Bottom Layer w1: U1.13 51.435,61.214 53.975,63.754 61.849,63.754 68.58,70.485 pad.40
NetDA9_4: DA9.4 R28.2 X8.1 | length 10.2
  Top Layer w1: R28.2 DA9.4@66.035,88.341 ; DA9.4 66.04,94.187 X8.1
NetDA10_1: DA10.1 R29.2 | length 2.7
  Top Layer w1: R29.2 DA10.1
NetDA10_2: DA10.2 pad.38 pad.82 pad.86 pad.87 U1.23 | length 101.4
  Top Layer w1: U1.23 38.735,48.006 27.94,48.006 27.94,63.246 28.702,64.008 39.37,64.008 pad.87 ; pad.86 82.677,71.374 pad.82 ; pad.38@84.455,77.724 DA10.2
  Bottom Layer w1: pad.87 pad.86 ; pad.82 pad.38
NetDA10_4: DA10.4 R30.2 X9.2 | length 10.3
  Top Layer w1: X9.2@78.486,95.758 79.375,94.869 R30.2 DA10.4
NetDA11_1: DA11.1 R31.2 | length 2.6
  Top Layer w1: R31.2 DA11.1
NetDA11_2: DA11.2 pad.47 U1.27 | length 86
  Top Layer w1: pad.47@14.986,77.851 DA11.2
  Bottom Layer w1: pad.47 14.986,74.549 10.287,69.85 10.287,40.894 13.97,37.211 41.021,37.211 42.418,38.608 45.466,38.608 48.895,42.037 U1.27
NetDA11_4: DA11.4 R36.2 X5.2 | length 11.2
  Top Layer w1: R36.2@10.165,88.336 DA11.4 13.081,88.971 13.081,90.678 16.129,93.726 X5.2
NetDA12_1: DA12.1 R32.2 | length 2.6
  Top Layer w1: R32.2 DA12.1
NetDA12_2: DA12.2 pad.45 U1.24 | length 81.6
  Top Layer w1: pad.45@30.734,77.851 DA12.2
  Bottom Layer w1: pad.45 30.734,74.803 27.559,71.628 18.161,71.628 13.716,67.183 13.716,42.164 15.24,40.64 39.243,40.64 41.275,42.672 U1.24
NetDA12_4: DA12.4 R37.2 X6.2 | length 11.3
  Top Layer w1: R37.2 DA12.4@28.189,88.341 ; DA12.4 28.194,92.329 X6.2
NetDA13_1: DA13.1 R33.2 | length 2.6
  Top Layer w1: R33.2 DA13.1
NetDA13_2: DA13.2 pad.43 U1.16 | length 22.6
  Top Layer w1: pad.43@46.228,77.724 DA13.2
  Bottom Layer w1: U1.16 43.815,64.77 46.228,67.183 pad.43
NetDA13_4: DA13.4 R34.2 X7.2 | length 11.4
  Top Layer w1: R34.2 DA13.4@43.683,88.341 ; DA13.4 43.688,92.329 X7.2
NetDA14_1: DA14.1 R35.2 | length 2.6
  Top Layer w1: R35.2 DA14.1
NetDA14_2: DA14.2 pad.41 U1.14 | length 30.3
  Top Layer w1: pad.41@61.595,77.724 DA14.2
  Bottom Layer w1: U1.14 48.895,62.357 52.451,65.913 58.166,65.913 61.595,69.342 pad.41
NetDA14_4: DA14.4 R38.2 X8.2 | length 11.4
  Top Layer w1: R38.2 DA14.4@59.05,88.341 ; DA14.4 59.055,92.202 X8.2
NetDA15_1: DA15.1 R39.2 | length 2.7
  Top Layer w1: R39.2 DA15.1
NetDA15_2: DA15.2 pad.39 pad.83 pad.84 pad.85 U1.22 | length 95.7
  Top Layer w1: U1.22 36.195,46.101 36.068,46.228 25.654,46.228 25.654,64.262 27.432,66.04 pad.85 ; pad.84 40.132,73.152 pad.83 ; pad.39@76.835,77.597 DA15.2
  Bottom Layer w1: pad.85 pad.84 ; pad.83 pad.39
NetDA15_4: DA15.4 R40.2 X9.3 | length 9.8
  Top Layer w1: R40.2 DA15.4 ; 73.105,88.548 X9.3
NetDA16_1: DA16.1 R41.2 | length 2.7
  Top Layer w1: DA16.1 R41.2@18.029,30.678
NetDA16_2: DA16.2 X4.1 | length 7.8
  Top Layer w1: X4.1 6.421,30.678 DA16.2
NetDA16_4: DA16.4 pad.52 pad.66 pad.67 U1.34 | length 60.8
  Top Layer w1: DA16.4 pad.52 pad.52@19.121,23.678 ; pad.67 pad.66
  Bottom Layer w1: pad.52 29.049,33.655 pad.67 ; pad.66 57.912,33.655 66.675,42.418 U1.34
NetDA17_1: DA17.1 R42.2 | length 2.8
  Top Layer w1: DA17.1 R42.2@18.156,41.219
NetDA17_2: DA17.2 X3.1 | length 7.8
  Top Layer w1: X3.1 6.477,41.275 12.771,41.275 DA17.2
NetDA17_4: DA17.4 pad.53 pad.68 pad.69 U1.33 | length 53.8
  Top Layer w1: DA17.4 pad.53 pad.53@19.248,34.219 ; pad.68 56.007,40.132 pad.69
  Bottom Layer w1: pad.53 26.345,34.219 27.686,35.56 41.783,35.56 43.307,37.084 46.482,37.084 49.53,40.132 49.784,40.132 pad.68 ; pad.69 61.595,40.259 64.135,42.799 U1.33
NetDA18_1: DA18.1 R44.2 | length 3.8
  Top Layer w1: DA18.1 R44.2@19.172,62.174
NetDA18_2: DA18.2 X1.1 | length 7.7
  Top Layer w1: X1.1 6.35,62.23 DA18.2@12.771,62.23
NetDA18_4: DA18.4 pad.55 U1.30 | length 49.3
  Top Layer w1: DA18.4 pad.55 pad.55@19.375,55.174
  Bottom Layer w1: pad.55 50.871,55.174 56.642,49.403 56.642,44.196 U1.30
NetDA19_1: DA19.1 R43.2 | length 2.7
  Top Layer w1: DA19.1 R43.2@18.156,51.76
NetDA19_2: DA19.2 X2.1 | length 7.9
  Top Layer w1: X2.1 6.421,51.76 DA19.2
NetDA19_4: DA19.4 pad.54 pad.88 pad.89 U1.2 | length 70.4
  Top Layer w1: DA19.4 pad.54 pad.54@19.233,44.76 ; pad.88 39.37,57.15 pad.89
  Bottom Layer w1: pad.54 21.646,44.76 28.321,51.435 pad.88 ; pad.89 78.359,57.15 79.375,58.166 U1.2
NetDA20_1: DA20.1 R45.2 | length 2.7
  Top Layer w1: DA20.1 R45.2@18.029,20.137
NetDA20_2: DA20.2 X15.1 | length 8
  Top Layer w1: X15.1 6.286,20.002 6.152,20.137 DA20.2
NetDA20_4: DA20.4 pad.51 pad.74 pad.75 pad.77 U1.7 | length 123.4
  Top Layer w1: DA20.4 pad.51 ; pad.74 62.323,31.589 65.659,34.925 pad.75 ; U1.7 66.675,53.213 73.914,45.974 85.471,45.974 87.122,44.323 87.122,36.957 85.09,34.925 pad.77
  Bottom Layer w1: pad.51 25.146,19.177 25.146,26.416 30.099,31.369 pad.74 ; pad.75 pad.77
NetJ1_2: J1.2 R11.2 | length 2.7
  Top Layer w1: J1.2 R11.2@43.581,17.938
NetJ1_3: J1.3 R12.2 R15.1 | length 9
  Top Layer w1: R15.1 R12.2 40.259,16.129 43.147,13.241 J1.3
NetQ1_1: Q1.1 R4.1 R7.2 VD2.2 | length 14.9
  Top Layer w1: R7.2 115.367,48.971 VD2.2@118.468,48.971 ; R4.1 118.567,49.784 Q1.1
NetQ1_2: Q1.2 VD12.A X13.2 | length 11.7
  Top Layer w2: Q1.2@136.37,50.165 X13.2
  Bottom Layer w2: VD12.A@140.502,50.165 X13.2
NetQ2_1: Q2.1 R5.1 R8.2 VD3.2 | length 15.5
  Top Layer w1: R8.2 115.367,60.528 VD3.2@118.595,60.528 ; VD3.2 VD3.2@118.618,61.214 ; R5.1@118.618,62.941 VD3.2@118.618,61.214 ; Q2.1 VD3.2@118.618,61.214
NetQ2_2: Q2.2 VD11.A X11.2 | length 11.9
  Top Layer w2: Q2.2@136.116,61.341 X11.2
  Bottom Layer w2: VD11.A@140.549,61.341 X11.2
NetQ3_1: Q3.1 R13.1 R16.2 VD4.2 | length 14.8
  Top Layer w1: R16.2 115.367,37.262 115.542,37.437 VD4.2 ; R13.1 118.567,38.354 Q3.1
NetQ3_2: Q3.2 VD14.A X14.2 | length 11.3
  Top Layer w2: Q3.2@136.751,39.116 X14.2
  Bottom Layer w2: VD14.A X14.2@144.232,39.076
NetQ4_1: Q4.1 R14.1 R17.2 VD5.2 | length 15
  Top Layer w1: R17.2 115.367,71.831 VD5.2@118.595,71.831 ; R14.1 118.567,72.644 Q4.1
NetQ4_2: Q4.2 VD13.A X12.2 | length 11.9
  Top Layer w2: Q4.2@135.989,72.517 X12.2
  Bottom Layer w2: VD13.A@140.676,72.517 X12.2
NetR1_1: R1.1 X10.1 | length 15.2
  Top Layer w2: R1.1 136.017,78.994 136.525,78.486 X10.1
NetR6_1: pad.18 R6.1 U1.8 VD1.K | length 91.9
  Top Layer w1: pad.18 114.935,84.328 116.459,82.804 VD1.K ; VD1.K@126.035,82.927 R6.1
  Bottom Layer w1: U1.8 64.135,61.849 69.469,67.183 89.662,67.183 93.98,71.501 93.98,87.376 94.742,88.138 115.062,88.138 pad.18
NetR6_2: R6.2 VD1.A VT1.1 | length 7.4
  Top Layer w1: VD1.A 129.235,82.804 R6.2 129.296,85.786 VT1.1
NetR11_1: pad.61 R11.1 U1.28 | length 25.9
  Top Layer w1: R11.1 pad.61@43.561,22.606
  Bottom Layer w1: pad.61 43.561,27.051 45.974,29.464 45.974,31.623 51.435,37.084 U1.28
NetR12_1: pad.60 pad.63 pad.64 R12.1 U1.29 | length 33.3
  Top Layer w1: R12.1 pad.60@40.259,22.733 ; pad.63 pad.64
  Bottom Layer w1: pad.60 40.259,26.289 43.942,29.972 43.942,33.02 pad.63 ; pad.64 53.975,36.703 U1.29
NetR15_2: R15.2 VT2.3 | length 5
  Top Layer w1: R15.2 VT2.3@37.592,26.162
NetR18_1: pad.59 R18.1 U1.35 | length 33.9
  Top Layer w1: R18.1 pad.59
  Bottom Layer w1: pad.59 52.578,25.146 69.215,41.783 U1.35
NetR18_2: R18.2 VT2.1 | length 1.5
  Top Layer w1: VT2.1 41.26,25.212 R18.2
NetR46_1: R46.1 U5.7 | length 2
  Top Layer w1: U5.7 R46.1@28.448,20.463
NetR46_2: pad.70 pad.71 pad.72 pad.73 R46.2 R47.1 U1.6 | length 109.4
  Top Layer w1: R46.2 28.194,24.13 32.766,24.13 32.893,24.003 ; R47.1 32.893,24.003 ; pad.70 32.893,24.003 ; pad.71 62.865,29.718 66.421,33.274 pad.72 ; U1.6 69.215,53.975 75.311,47.879 86.487,47.879 89.281,45.085 89.281,36.322 85.979,33.02 pad.73
  Bottom Layer w1: pad.70 32.893,28.956 33.655,29.718 pad.71 ; pad.72 pad.73@74.676,33.274
NetR50_2: R50.2 R51.2 U1.5 | length 35.9
  Top Layer w1: U1.5 71.755,62.865 74.676,65.786 100.838,65.786 R51.2
NetU1_31: U1.31
NetU1_32: pad.90 pad.91 U1.32 X5.3 X6.3 X7.3 X8.3 | length 156.6
  Top Layer w1: pad.90 18.415,67.945 11.938,67.945 7.747,72.136 7.747,90.551 11.129,93.933 X5.3 11.129,97.964 57.611,97.964 X8.3 ; X6.3 26.623,97.79 ; pad.91 29.718,49.657 58.039,49.657 61.595,46.101 U1.32 ; X7.3 42.117,97.79
  Bottom Layer w1: pad.90 19.685,61.468 pad.91
NetU5_1: pad.92 pad.94 pad.95 U5.1 U5.2 X16.1 | length 14.8
  Top Layer w4: X16.1 26.543,13.005
  Bottom Layer w4: X16.1 26.543,12.954
NetU5_3: pad.93 pad.96 pad.97 U5.3 U5.4 X16.2 | length 16.5
  Top Layer w2.5: U5.4@31.242,13.894 31.623,13.513
  Top Layer w4: X16.2 31.623,13.513
  Bottom Layer w4: X16.2 31.623,13.589
NetVT1_3: VT1.3 X10.2 | length 9.5
  Top Layer w1: VT1.3 143.129,84.836 X10.2
VCC: C1.1 DA1.4 DA2.4 DA3.4 DA4.4 DD1.3 DD2.3 pad.6 pad.7 pad.8 pad.9 pad.10 pad.11 pad.19 VD11.K VD12.K VD13.K VD14.K X11.1 X12.1 X13.1 X14.1 X30.1 | length 214.7
  Top Layer w1: DD2.3 pad.6 pad.6@97.522,86.346 ; DD1.3 pad.7 pad.7@106.412,86.219 ; pad.8 110.18,40.005 DA3.4 ; pad.9 110.236,51.943 DA1.4 ; pad.10 110.236,63.754 DA2.4 ; pad.11 110.236,74.422 DA4.4 ; pad.19 119.888,85.979 122.682,88.773 X30.1
  Bottom Layer w1: pad.6 106.426,86.106 pad.7@106.426,85.979 ; pad.7 pad.7@106.426,85.979 ; pad.8 pad.9 pad.10 pad.11 106.426,75.819 pad.7@106.426,85.979 ; pad.19 pad.7@106.426,85.979
  Bottom Layer w2: VD14.K X14.1@144.232,34.076 ; VD12.K 144.232,45.125 X13.1 148.463,45.085 ; VD11.K 144.105,56.428 X11.1 147.32,56.261 ; VD13.K 140.756,67.437 X12.1 148.463,67.437
  Bottom Layer w3: 122.682,89.408 X30.1 X30.1@122.682,94.996 ; 123.317,89.408 144.907,89.408 148.463,85.852 148.463,53.975 ; 136.144,89.535 C1.1 ; X14.1 148.336,34.036 148.336,54.737
pads on no net: A1.13 A2.13 U1.1 U1.3 U1.4 U1.17 U1.18 U1.19 U1.20 U1.39 U1.40
copper on no net: | length 499.9
  Top Layer w0.3: -0.254,0.127 149.86,0.127 149.86,100.076 0.254,100.076 0.127,100.076 -0.127,99.822 -0.254,99.695 -0.254,0.127

## Polygon pours and split planes (outlines as drawn)
GND on Bottom Layer "B_Layer-No Net" (solid, pour order 8): -0.254,100.203 -0.127,100.076 149.987,100.076 149.987,0.127 149.86,0 -0.127,0